# Altium PCB Cashstick.PcbDoc
Units mm, origin at the board's own origin, x right, y up, seen from the top; angles counter-clockwise.
Board outline 51.94 x 15.24 mm, 2 copper layers (Top Layer, Bottom Layer); 30 components, 24 nets, 165 pads, 77 vias.
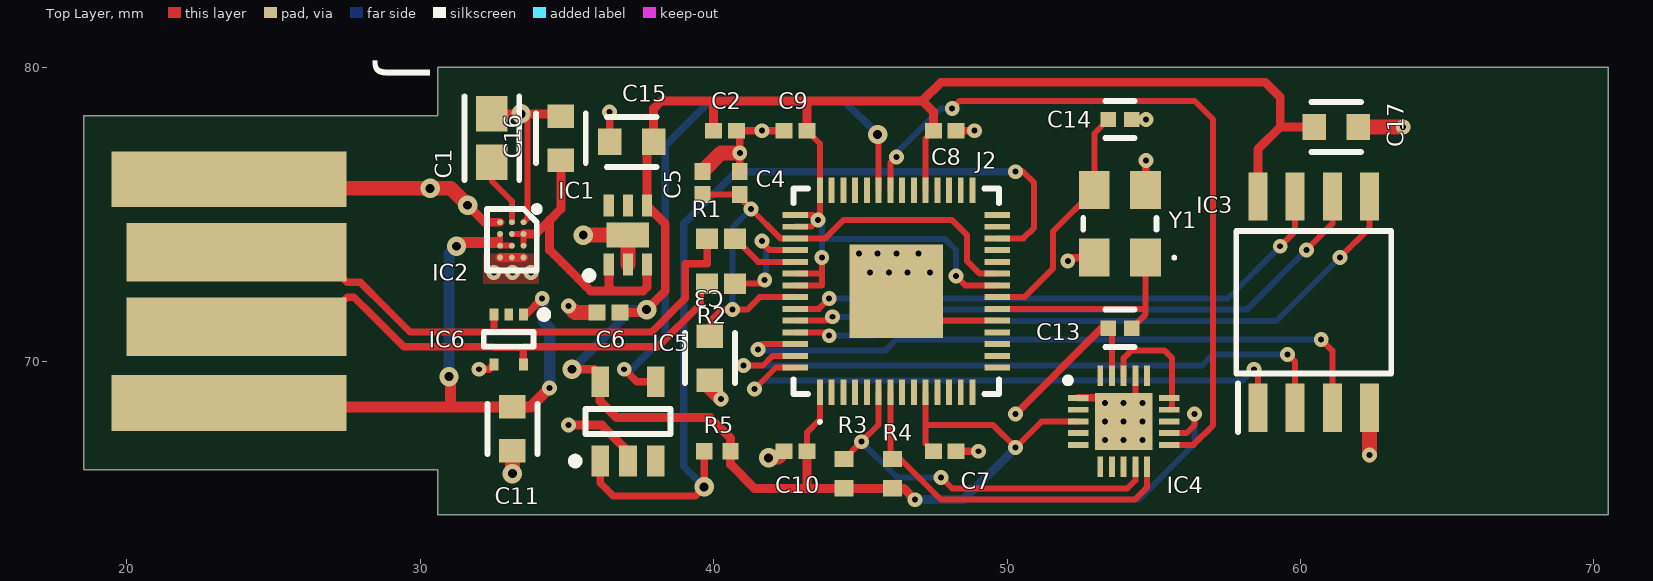
[diagram p0: Top Layer view]
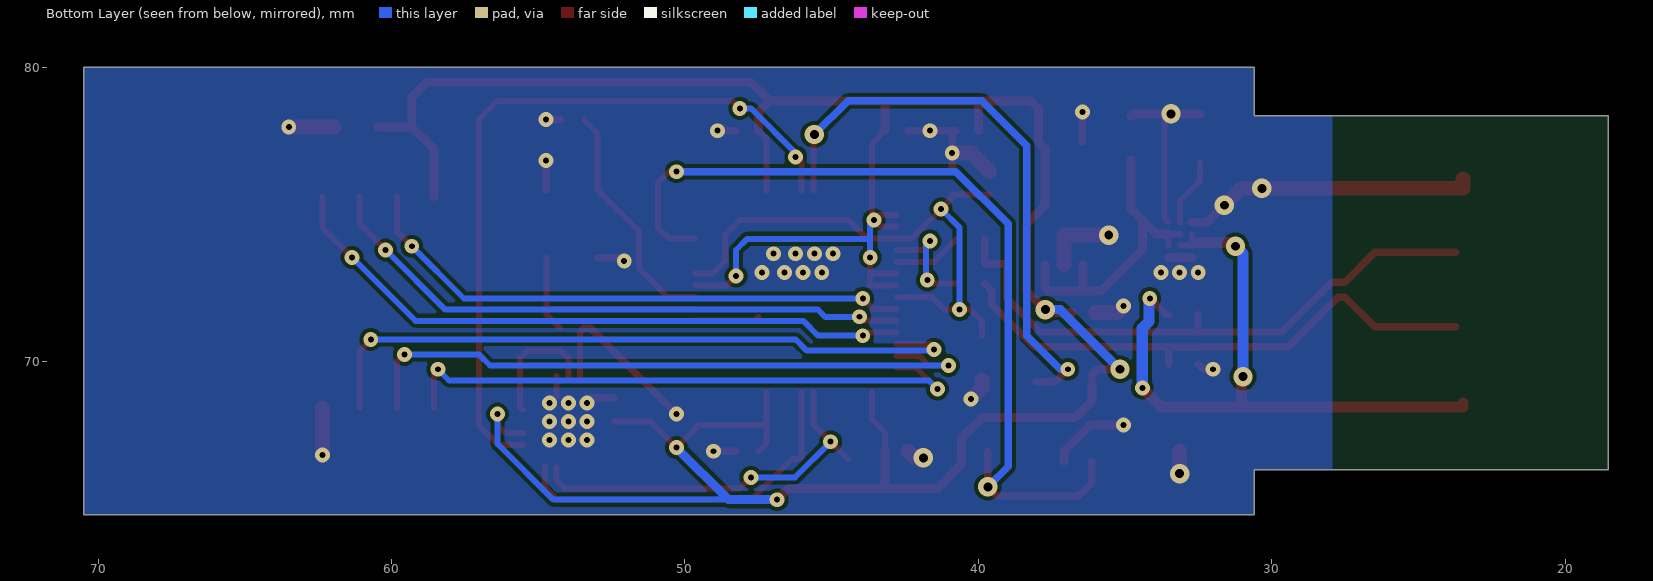
[diagram p1: Bottom Layer view, seen from below]

## Layer stack, top to bottom
Top Solder: solder mask 0.0102, Solder Resist, Dk 3.5
Top Layer: signal copper 0.0356
Dielectric 1: dielectric 0.32, FR-4, Dk 4.8
Bottom Layer: signal copper 0.0356
Bottom Solder: solder mask 0.0102, Solder Resist, Dk 3.5

## Board outline
70.485,80.01 70.485,64.77 30.607,64.77 30.607,66.294 18.542,66.294 18.542,78.359 30.607,78.359 30.607,80.01

## Design rules (kind name [scope] priority, off if disabled: settings)
Clearance [All] p1: gap=0.127 ignorepadtopadclearanceinfootprint=FALSE
DiffPairsRouting [All] p1: maxlimit=0.254 minlimit=0.254 mostfreqgap=0.254 toplayer_minwidth=0.127 toplayer_maxwidth=0.381 toplayer_prefwidth=0.381 bottomlayer_minwidth=0.127 bottomlayer_maxwidth=0.381 bottomlayer_prefwidth=0.381 maxuncoupledlength=12.7
PolygonConnect [All] p1: connectstyle=Direct reliefconductorwidth=0.254 reliefentries=4 polygonreliefangle="90 Angle" airgapwidth=0.254
RoutingVias [All] p1: holewidth=0.203 width=0.508 viastyle="Through Hole" minholewidth=0.127 minwidth=0.508 maxholewidth=0.711 maxwidth=1.27
SolderMaskExpansion [All] p1: expansion=0.102 istentingtop=FALSE
SupplyNets "Schematic Supply Nets_2" [InNet('GND')] p1: voltage=0.000
SupplyNets "Schematic Supply Nets_1" [InNet('3v3')] p2: voltage=0.000
SupplyNets "Schematic Supply Nets" [InNet('1v1')] p3: voltage=0.000
Width [All] p1: maxlimit=0.508 minlimit=0.102 preferedwidth=0.254
29 further rules are at their usual default settings.

## Classes and differential pairs
differential pair USB_D: +USB_D_P -USB_D_N

## Components (designator, comment, footprint, x,y, rotation, side; value= is the part's Value field where it differs from the comment)
C1 "06036D105KAT2A" FP-0603-L_1_6_0_15-W_0_81-IPC_A 32.448,77.597 r90 top
C2 "0402YC104JAT2A" CAPC1005X56X25LL10T15 40.386,77.851 r180 top
C3 "CC0603KRX5R6BB475" FP-CC0603-DA-MFG 39.878,70.104 r270 top value="4.7 uF"
C4 "0402YC104JAT2A" CAPC1005X56X25LL10T15 40.894,76.073 r270 top
C5 "0402YC104JAT2A" CAPC1005X56X25LL10T15 39.624,76.073 r270 top
C6 "0402YC104JAT2A" CAPC1005X56X25LL10T15 36.422,71.657 r0 top
C7 "0402YC104JAT2A" CAPC1005X56X25LL10T15 47.879,66.929 r180 top
C8 "0402YC104JAT2A" CAPC1005X56X25LL10T15 47.879,77.851 r180 top
C9 "0402YC104JAT2A" CAPC1005X56X25LL10T15 42.799,77.851 r0 top
C10 "0402YC104JAT2A" CAPC1005X56X25LL10T15 42.799,66.929 r0 top
C11 "CC0603KRX5R6BB475" FP-CC0603-DA-MFG 33.147,67.691 r270 top value="4.7 uF"
C13 "C0402C150J8HACTU" FP-C0402-BB-MFG 53.848,71.12 r0 top value="15 pF"
C14 "C0402C150J8HACTU" FP-C0402-BB-MFG 53.848,78.232 r180 top value="15 pF"
C15 "CC0603KRX5R6BB475" FP-CC0603-DA-MFG 37.211,77.47 r180 top value="4.7 uF"
C16 "CC0603KRX5R6BB475" FP-CC0603-DA-MFG 34.798,77.597 r90 top value="4.7 uF"
C17 "CC0603KRX5R6BB475" FP-CC0603-DA-MFG 61.214,77.978 r0 top value="4.7 uF"
IC1 "RT9013-33GQW" SON65P200X200X80-7N 37.084,74.295 r90 top
IC2 "TPD1S514-1YZR" BGA12C40P4X3_199X129X62 33.128,74.133 r270 top
IC3 "W25Q32JVSSIM_TR" SOIC127P790X216-8N 60.452,72.009 r90 top
IC4 "SE050E2HQ1_Z01Z3Z" QFN40P300X300X33-21N-D 53.975,67.945 r0 top
IC5 "TPS3820-33DBVRG4" TI-DBV5_V 37.084,67.945 r90 top
IC6 "TPD2E001DRLRG4" DRL0005A_L 33.02,70.739 r270 top
J "USB A PCB" "USB PCB TRACE" 23.749,72.39 r0 top
J2 "SC0914_13_" SC091413 46.225,72.381 r90 top
R1 "CR0402-FX-27R4GLF" RESC1005X40X25ML10T10 40.259,74.168 r0 top
R2 "CR0402-FX-27R4GLF" RESC1005X40X25ML10T10 40.259,72.644 r180 top
R3 "2K2 5% 0402(1005)" RESC0402(1005)_N 44.45,66.167 r90 top value="2200.00 Ohm"
R4 "2K2 5% 0402(1005)" RESC0402(1005)_N 46.101,66.167 r270 top value="2200.00 Ohm"
R5 "TNPW040210K0DEED" RESC1005X40X20NL05T10 40.132,66.929 r0 top
Y1 "ABM8-272-T3" ABM8272T3 53.848,74.676 r90 top

## Footprints (in the part's own frame and the unit in brackets; to place one, negate y for a bottom-side part, rotate by r counter-clockwise, add the part's x,y. Pads: shape width x height; smd on the part's side, far side on the other; paste and mask are expansions set on the pad)
ABM8272T3 [mm]
  rect 1.3x1.05 smd: 1(-1.15,-0.875) 2(1.15,-0.875) 3(1.15,0.875) 4(-1.15,0.875)
  silkscreen extent -1.2,-1.9 0.2,1.25, body extent -1.6,-1.25 1.6,1.25, height 0.75
BGA12C40P4X3_199X129X62 [mm]
  round 0.2 smd: A1(-0.6,0.4) A2(-0.2,0.4) A3(0.2,0.4) A4(0.6,0.4) B1(-0.6,0) B2(-0.2,0) B3(0.2,0) B4(0.6,0) C1(-0.6,-0.4) C2(-0.2,-0.4) C3(0.2,-0.4) C4(0.6,-0.4)
  silkscreen extent -1.15,-0.85 1.05,0.95, body extent -0.99,-0.64 0.99,0.64, height 0.63
CAPC1005X56X25LL10T15 [mm] "Chip Capacitor, 2-Leads, Body 1.00x0.50mm, IPC High Density"
  rect 0.58x0.54 smd: 1(-0.39,0) 2(0.39,0)
  body extent -0.55,-0.3 0.55,0.3, height 0.56
DRL0005A_L [mm] "SOT23, 5-Leads, Body 1.7x1.3mm, Pitch 0.5mm, IPC High Density"
  rect 0.4x0.3 smd: 1(-0.85,0.5) 2(-0.85,0) 3(-0.85,-0.5) 4(0.85,-0.5) 5(0.85,0.5)
  silkscreen extent -0.97,-0.85 0.25,1.33, body extent -0.65,-0.85 0.65,0.85, height 0.6
FP-0603-L_1_6_0_15-W_0_81-IPC_A [mil]
  rect 47.5x42.06 smd paste+0 mask+0: 1(-32.51,0) 2(32.51,0)
  silkscreen extent -56,-37 56,37, body extent -76,-41 76,41, height 10
FP-C0402-BB-MFG [mm]
  rect 0.52x0.52 smd paste+0 mask+0: 1(-0.4,0) 2(0.4,0)
  silkscreen extent -0.5,-0.64 0.5,0.64, body extent -0.8,-0.4 0.8,0.4, height 0.25
FP-CC0603-DA-MFG [mm]
  rect 0.8x0.9 smd paste+0 mask+0: 1(-0.75,0) 2(0.75,0)
  silkscreen extent -0.85,-0.85 0.85,0.85, body extent -0.8,-0.4 0.8,0.4, height 0.9
QFN40P300X300X33-21N-D [mm]
  rect 0.7x0.2 smd: 1(-1.55,0.8) 2(-1.55,0.4) 3(-1.55,0) 4(-1.55,-0.4) 5(-1.55,-0.8) 11(1.55,-0.8) 12(1.55,-0.4) 13(1.55,0) 14(1.55,0.4) 15(1.55,0.8)
  rect 0.2x0.7 smd: 6(-0.8,-1.55) 7(-0.4,-1.55) 8(0,-1.55) 9(0.4,-1.55) 10(0.8,-1.55) 16(0.8,1.55) 17(0.4,1.55) 18(0,1.55) 19(-0.4,1.55) 20(-0.8,1.55)
  rect 1.95x1.95 smd: 21(0,0)
  silkscreen extent -2,1.3 -1.8,1.5, body extent -1.55,-1.55 1.55,1.55, height 0.33
RESC0402(1005)_N [mm] "Chip Resistor, Body 1.0x0.5mm, IPC Medium Density"
  rect 0.55x0.65 smd: 1(-0.5,0) 2(0.5,0)
  body extent -0.52,-0.27 0.53,0.28, height 0.4
RESC1005X40X20NL05T10 [mm] "Chip Resistor, 2-Leads, Body 1.00x0.50mm, IPC Medium Density"
  rect 0.55x0.55 smd: 1(-0.45,0) 2(0.45,0)
  body extent -0.53,-0.27 0.53,0.28, height 0.4
RESC1005X40X25ML10T10 [mm] "Chip Resistor, 2-Leads, Body 1.00x0.50mm, IPC Low Density"
  rect 0.75x0.7 smd: 1(-0.475,0) 2(0.475,0)
  body extent -0.55,-0.3 0.55,0.3, height 0.4
SC091413 [mm]
  rect 0.875x0.2 smd: 1(-3.438,2.6) 2(-3.438,2.2) 3(-3.438,1.8) 4(-3.438,1.4) 5(-3.438,1) 6(-3.438,0.6) 7(-3.438,0.2) 8(-3.438,-0.2) 9(-3.438,-0.6) 10(-3.438,-1) 11(-3.438,-1.4) 12(-3.438,-1.8) 13(-3.438,-2.2) 14(-3.438,-2.6) 29(3.438,-2.6) 30(3.438,-2.2) 31(3.438,-1.8) 32(3.438,-1.4) 33(3.438,-1) 34(3.438,-0.6) 35(3.438,-0.2) 36(3.438,0.2) 37(3.438,0.6) 38(3.438,1) 39(3.438,1.4) 40(3.438,1.8) 41(3.438,2.2) 42(3.438,2.6)
  rect 0.2x0.875 smd: 15(-2.6,-3.438) 16(-2.2,-3.438) 17(-1.8,-3.438) 18(-1.4,-3.438) 19(-1,-3.438) 20(-0.6,-3.438) 21(-0.2,-3.438) 22(0.2,-3.438) 23(0.6,-3.438) 24(1,-3.438) 25(1.4,-3.438) 26(1.8,-3.438) 27(2.2,-3.438) 28(2.6,-3.438) 43(2.6,3.438) 44(2.2,3.438) 45(1.8,3.438) 46(1.4,3.438) 47(1,3.438) 48(0.6,3.438) 49(0.2,3.438) 50(-0.2,3.438) 51(-0.6,3.438) 52(-1,3.438) 53(-1.4,3.438) 54(-1.8,3.438) 55(-2.2,3.438) 56(-2.6,3.438)
  rect 3.2x3.2 smd: 57(0,0)
  silkscreen extent -4.5,-3.5 3.5,3.5, body extent -3.5,-3.5 3.5,3.5, height 0.92
SOIC127P790X216-8N [mm]
  rect 1.65x0.65 smd: 1(-3.6,1.905) 2(-3.6,0.635) 3(-3.6,-0.635) 4(-3.6,-1.905) 5(3.6,-1.905) 6(3.6,-0.635) 7(3.6,0.635) 8(3.6,1.905)
  silkscreen extent -4.43,-2.64 2.42,2.64, body extent -3.95,-2.64 3.95,2.64, height 2.16
SON65P200X200X80-7N [mm]
  rect 0.75x0.35 smd: 1(-1,0.65) 2(-1,0) 3(-1,-0.65) 4(1,-0.65) 5(1,0) 6(1,0.65)
  rect 0.85x1.45 smd: 7(0,0)
  silkscreen extent -1.5,1.2 -1.25,1.45, body extent -1.05,-1 1.05,1, height 0.8
TI-DBV5_V [mm] "SOT23, 5-Leads, Body 2.9x1.6mm, Pitch 0.95mm"
  rect 1.05x0.6 smd paste-0.025 mask+0.07: 1(-1.35,0.95) 2(-1.35,0) 3(-1.35,-0.95) 4(1.35,-0.95) 5(1.35,0.95)
  silkscreen extent -1.47,-1.45 0.43,1.92, body extent -0.8,-1.45 0.8,1.45, height 1.45
"USB PCB TRACE" [mm] "USB TYPE A on PCB TRACE"
  rect 8x1.9 smd: 1(-0.254,-3.815) 4(-0.254,3.81)
  rect 7.5x2 smd: 2(-0.004,-1.223) 3(-0.004,1.318)

## Part data
C1: library part CMP-2006-04474-2, "General Purpose Ceramic Capacitor, 0603, 1uF, 10%, X5R, 15%, 6.3V", Capacitance=1uF, Case Code (Imperial)=0603, Case Code (Metric)=1608, Dielectric=X5R, Insulation Resistance=100GR, Max Operating Temperature=85°C, Min Operating Temperature=-55°C, Package Quantity=1, Tolerance=10%, Voltage=6.3V, Case/Package=0603, Construction=Flat, Contact Plating=Tin, Depth=0.81mm, Dissipation Factor=5%, Height=0.9mm, Lead Free="Lead Free", Length=1.6mm, Mount="Surface Mount", Number of Pins=2, Packaging="Tape and Reel", Radiation Hardening=No, REACH SVHC="No SVHC", RoHS Compliant=Yes, Series=-, Termination=SMD/SMT, Thickness=0.035inch, Voltage Rating=6.3V, Voltage Rating (DC)=6.3V, Width=0.032inch
C2 C4 C5 C6 C7 C8 C9 C10: library part CMP-2008-02926-1, Manufacturer="AVX Interconnect / Elco", Part Number=0402YC104JAT2A
C3 C11 C15 C16 C17: library part CMP-2000-06074-2, "CAP CER 4.7UF 10V X5R 0603", Capacitance="4.7 uF", Manufacturer=YAGEO, Package=CC0603-DA, Temperature="-55°C to +125°C", Temperature Characteristic=X5R, Temperature Coefficient=15%, Temperature Range High=+125°C, Temperature Range Low=-55°C, Tolerance=0.1, Voltage="10 V", Automotive=No, Category=Cap, ComponentLink2Description=Datasheet, ComponentLink2URL=http://www.yageo.com/documents/recent/UPY-GPHC_X7R_6.3V-to-50V_18.pdf, Device Class L1="Passive Components", Device Class L2=Capacitors, Device Class L3="Ceramic Capacitors", Digikey Description="CAP CER 4.7UF 10V X5R 0603", Footprint Url=http://www.yageo.com/exep/pages/download/literatures/UPY-C_GEN_24.pdf, Height=0.9mm, Lead Free=Yes, Manufacturer Part Number=CC0603KRX5R6BB475, Material=Ceramic, Mouser Description="4.7µF Surface Mount, MLCC 0603 (1608 Metric) Package Ceramic Capacitors", Octopart=https://octopart.com/cc0603krx5r6bb475-yageo-9292507, RoHS=TRUE, Voltage Rating="10 V"
C13 C14: library part CMP-03020-013640-1, "C0402 15 pF X8R 5.00% 10 V", Capacitance="15 pF", Manufacturer=Kemet, Package=C0402-BB, Temperature="-55°C to +125°C", Temperature Characteristic=X8R, Temperature Coefficient=15%, Temperature Range High=+125°C, Temperature Range Low=-55°C, Tolerance=0.05, Voltage Rating="10 V", Automotive=No, Category=Cap, ComponentLink2Description=Datasheet, ComponentLink2URL=https://content.kemet.com/datasheets/KEM_C1002_X7R_SMD.pdf, Device Class L1="Passive Components", Device Class L2=Capacitors, Device Class L3="Ceramic Capacitors", Height=0.55mm, Ipc Land Pattern Name=CAPC10050X50, Lead Free=Yes, Manufacturer Part Number=C0402C150J8HACTU, Material=Ceramic, Octopart=https://octopart.com/c0402c150j8hactu-kemet-88724175, RoHS=TRUE
IC1: "Integrated Circuit", Manufacturer_Name=RICHTEK, Mouser Part Number=835-RT9013-33GQW, Datasheet Link=https://eu.mouser.com/datasheet/2/1458/DS9013_10-3104853.pdf, Height=0.8mm, Manufacturer_Part_Number=RT9013-33GQW, Mouser Price/Stock=https://www.mouser.co.uk/ProductDetail/Richtek/RT9013-33GQW?qs=amGC7iS6iy%2Fa0fR0lBiZlg%3D%3D
IC2: "Integrated Circuit", Manufacturer_Name="Texas Instruments", Mouser Part Number=595-TPD1S514-1YZR, Arrow Part Number=TPD1S514-1YZR, Arrow Price/Stock=https://www.arrow.com/en/products/tpd1s514-1yzr/texas-instruments, Datasheet Link=http://www.ti.com/lit/gpn/tpd1s514, Height=0.625mm, Manufacturer_Part_Number=TPD1S514-1YZR, Mouser Price/Stock=https://www.mouser.co.uk/ProductDetail/Texas-Instruments/TPD1S514-1YZR?qs=U0ECReq1GB8vEu4GjuBhFg%3D%3D
IC3: "Integrated Circuit", Arrow Part Number="W25Q32JVSSIM TR", Manufacturer_Name=Winbond, Mouser Part Number=454-W25Q32JVSSIMTR, Arrow Price/Stock=https://www.arrow.com/en/products/w25q32jvssimtr/winbond-electronics?utm_currency=USD&region=nac, Datasheet Link=https://www.mouser.com/datasheet/2/949/w25q32jv_dtr_revg_03272018_plus-1489786.pdf, Height=2.16mm, Manufacturer_Part_Number="W25Q32JVSSIM TR", Mouser Price/Stock=https://www.mouser.co.uk/ProductDetail/Winbond/W25Q32JVSSIM-TR?qs=qSfuJ%252Bfl%2Fd55hO45Ox4sXQ%3D%3D
IC4: "Integrated Circuit", Arrow Part Number=SE050E2HQ1/Z01Z3Z, Manufacturer_Name=NXP, Mouser Part Number=771-SE050E2HQ1Z01Z3Z, Arrow Price/Stock=https://www.arrow.com/en/products/se050e2hq1z01z3z/nxp-semiconductors?utm_currency=USD&region=nac, Datasheet Link=https://www.nxp.com/docs/en/package-information/SOT1969-1.pdf, Height=0.33mm, Manufacturer_Part_Number=SE050E2HQ1/Z01Z3Z, Mouser Price/Stock=https://www.mouser.co.uk/ProductDetail/NXP-Semiconductors/SE050E2HQ1-Z01Z3Z?qs=MyNHzdoqoQJLcBuQE9NcBA%3D%3D
IC5: library part CMP-0338-00012-1, "Processor Supervisory Circuit, 1 Supply Monitored, -40 to 85 degC, 5-Pin SOT-23 (DBV), Green (RoHS & no Sb/Br)", Manufacturer="Texas Instruments", Operating Temperature Range="-40 to 85 degC", Rating=Catalog, Threshold Voltage="2.93 V Typ.", # of Supplies Monitored=1, ComponentLink1Description="Manufacturer URL", ComponentLink1URL=www.ti.com, ComponentLink2Description=Datasheet, ComponentLink2URL=http://www.ti.com/lit/ds/symlink/tps3820-33.pdf, ComponentLink3Description="Package Specification", ComponentLink3URL=http://www.ti.com/lit/ml/mpds018j/mpds018j.pdf, DatasheetVersion=SLVS165J, Iq="15 uA Typ.", Mounting Technology="Surface Mount", Output Driver Type / Reset Output="Active-low, Push-pull", PackageDescription="5-Pin Plastic Small Outline, Body 1.6 x 2.9 mm, Pitch 0.95 mm", PackageVersion=4073253-4/L, Packing="Tape and Reel", PartNumber=TPS3820-33DBVRG4, Reset Threshold Accuracy=2.4%, RoHS=TRUE, Time Delay="25 ms", VCC="1.1 V Min.", Watchdog Timer WDI="0.2 s"
IC6: library part CMP-0326-00050-2, "Low-Capacitance + / - 15 kV ESD-Protection Array for High-Speed Data Interfaces, 2 Channels, -40 to +85 degC, 5-pin SOT (DRL), Green (RoHS & no Sb/Br)", Breakdown Voltage(Min)(V)=11, IO Capacitance(Typ)(pF)=1.5, IO Leakage Current(nA)=1, Manufacturer="Texas Instruments", ComponentLink1Description="Manufacturer URL", ComponentLink1URL=http://www.ti.com/, ComponentLink2Description=Datasheet, ComponentLink2URL=http://www.ti.com/general/docs/lit/getliterature.tsp?genericPartNumber=TPD2E001&fileType=pdf, ComponentLink3Description="URL Link1", ComponentLink3URL=SamplesURL:http://www.ti.com/product/tpd2e001#samples, DatasheetVersion=SLLS684F, Eco-Plan="Green (RoHS & no Sb/Br)", IEC 61000-4-2 Air-Gap(+/- kV)=15, IEC 61000-4-2 Contact(+/- kV)=8, Mounting Technology="Surface Mount", PackageDescription="5-Pin Plastic Small Outline, Flat Lead 0.5 mm Pitch", PackageReference=DRL0005A, PackageVersion="revD, Aug-2007", PartNumber=TPD2E001DRLRG4, SubFamily="ESD Solution", USB High Speed=TRUE
J2: "Connector", Manufacturer_Name=RASPBERRY-PI, Manufacturer_Part_Number=SC0914(13), Mouser Part Number=358-SC091413, Datasheet Link=https://datasheets.raspberrypi.com/rp2040/rp2040-datasheet.pdf, Height=0.9mm, Mouser Price/Stock=https://www.mouser.co.uk/ProductDetail/Raspberry-Pi/SC091413?qs=T%252BzbugeAwjhr%252BUbBr3TJcw%3D%3D
R1 R2: library part CMP-2002-05023-1, Manufacturer=Bourns, Part Number=CR0402-FX-27R4GLF
R3 R4: library part CMP-1011-00082-1, "2K2 0.063W 5% 0402 (1005 Metric)  SMD", Case-EIA=0402, Case-Metric=1005, Power="0.063 W", Tolerance="5 %", Technology=SMT
R5: library part CMP-2002-01682-1, Manufacturer="Vishay BCcomponents", Part Number=TNPW040210K0DEED
Y1: "Crystal or Oscillator", Manufacturer_Name=ABRACON, Mouser Part Number=815-ABM8-272-T3, Datasheet Link=https://abracon.com/datasheets/ABM8-272-T3.pdf, Height=0.8mm, Manufacturer_Part_Number=ABM8-272-T3, Mouser Price/Stock=https://www.mouser.co.uk/ProductDetail/ABRACON/ABM8-272-T3?qs=QpmGXVUTftEj6miOiJBMxQ%3D%3D

## Via types
v1: diameter 0.508, hole 0.203, Top Layer to Bottom Layer, 65 vias
v2: diameter 0.66, hole 0.305, Top Layer to Bottom Layer, 12 vias

## Nets (pads, with @x,y where several pads share a name; then routed paths per layer and width w, separated by ;. In a path a pad name is that pad's centre, name@x,y a point inside that pad or via, vN(x,y) a via of type N, cw(c..) or ccw(c..) an arc to the next point about the centre after c; other vN are vias at no path point)
1v1: C3.1 C4.2 C5.2 J2.23 J2.45 J2.50 | length 19.8
  Top Layer w0.203: C5.2 C4.2 40.894,75.565 v1(41.275,75.184) 42.278,74.181 J2.45 43.802,74.181 44.424,74.803 48.133,74.803 48.641,74.295 48.641,73.406 49.066,72.981 J2.23 ; C3.1 39.878,71.374 40.259,71.755 v1(40.64,71.755) ; v1@40.703,71.755 v1(40.64,71.755) ; J2.50 41.574,72.181 41.148,71.755 v1(40.64,71.755)
  Bottom Layer w0.203: v1(40.64,71.755) 40.64,74.549 v1(41.275,75.184)
3v3: C2.2 C6.2 C7.2 C8.2 C9.2 C10.2 C15.1 C17.1 IC1.4 IC3.8 IC4.3 IC4.12 IC5.5 J2.1 J2.10 J2.22 J2.33 J2.42 J2.43 J2.44 J2.48 J2.49 R3.1 R4.2 R5.2 | length 101.4
  Top Layer w0.203: 35.814,69.723 35.819,69.718 IC5.5@35.936,69.718 ; IC5.5 IC5.5@36.134,69.52 ; J2.49 43.688,72.581 43.688,72.981 ; J2.48 43.688,72.981 ; J2.44 43.339,74.581 v1(43.561,74.803) ; J2.43 43.383,74.981 v1(43.561,74.803) ; C10.2 43.189,67.573 43.625,68.009 J2.1 ; C9.2 43.625,77.415 J2.42 43.625,74.867 v1(43.561,74.803) ; v1(43.688,73.533) 43.688,72.981 ; J2.10 47.225,67.818 ; J2.33 47.225,77.587 C8.2 ; C7.2 47.225,67.193 47.225,67.818 ; v1(48.26,72.898) 48.577,72.581 J2.22 ; IC4.3 51.181,67.945 v1(50.292,67.056) 49.53,67.818 47.225,67.818 ; IC4.12 56.115,67.545 56.388,67.818 v1(56.388,68.199)
  Top Layer w0.305: v2(35.179,69.723) 35.814,69.723 ; IC5.5@35.936,69.718 IC5.5@36.134,69.52 ; IC5.5 36.134,68.641 36.703,68.072 39.878,68.072 40.582,67.368 R5.2 40.582,66.479 41.402,65.659 41.41,65.667 43.18,65.667 ; C6.2 37.621,71.657 v2(37.719,71.755) 38.354,72.39 38.354,74.675 IC1.4 37.734,77.243 C15.1 37.961,78.601 38.227,78.867 40.005,78.867 ; C2.2 39.996,78.858 40.005,78.867 ; C10.2 43.189,65.676 43.18,65.667 ; C9.2 43.18,77.86 43.18,78.867 ; v1(46.863,65.278) 46.474,65.667 R4.2 R3.1 43.18,65.667 ; C8.2 47.489,78.495 47.117,78.867 ; IC3.8 58.547,77.216 59.309,77.978 ; C17.1 59.309,77.978 ; 40.005,78.867 43.18,78.867 ; 43.18,78.867 47.117,78.867 ; 47.117,78.867 47.752,79.502 58.801,79.502 59.309,78.994 59.309,77.978
  Bottom Layer w0.203: v1(43.561,74.803) 43.688,74.676 43.688,74.105 ; v1(43.688,73.533) 43.688,74.105 ; v1(48.26,72.898) 48.26,73.787 47.879,74.168 43.752,74.168 43.688,74.105 ; 48.471,65.278 54.483,65.278 56.388,67.183 v1(56.388,68.199)
  Bottom Layer w0.305: v2(35.179,69.723) 37.211,71.755 v2(37.719,71.755) ; v1(46.863,65.278) 48.514,65.278 v1(50.292,67.056)
050_EN: IC4.11 J2.36 | length 25.3
  Top Layer w0.203: J2.36 46.025,76.759 v1(46.228,76.962) ; v1(48.133,78.613) 48.387,78.867 56.388,78.867 57.023,78.232 57.023,67.818 56.35,67.145 IC4.11
  Bottom Layer w0.203: v1(46.228,76.962) 46.228,77.089 47.752,78.613 v1(48.133,78.613)
050_I2S_SCL: IC4.10 J2.7 R4.1 | length 12.4
  Top Layer w0.203: J2.7 46.025,66.743 R4.1 46.363,66.667 47.752,65.278 54.356,65.278 54.775,65.697 IC4.10
050_I2S_SDA: IC4.9 J2.6 R3.2 | length 13.3
  Top Layer w0.203: R3.2 v1(45.037,67.255) 45.625,67.842 J2.6 ; v1(47.752,66.04) 48.133,65.659 54.102,65.659 54.375,65.932 IC4.9
  Bottom Layer w0.203: v1(45.037,67.255) 46.252,66.04 v1(47.752,66.04)
GND: C1.2 C2.1 C3.2 C4.1 C5.1 C6.1 C7.1 C8.1 C9.1 C10.1 C11.2 C13.1 C14.1 C15.2 C16.2 C17.2 IC1.2 IC1.7 IC2.A1 IC2.A4 IC2.B4 IC2.C1 IC2.C4 IC3.4 IC4.1 IC4.17 IC4.19 IC4.21 IC5.2 IC6.4 J2.19 J2.57 J.4 Y1.2 Y1.4 | length 49.1
  Top Layer w0.203: v2(33.439,78.423) 33.655,78.207 33.655,74.86 IC2.A1 ; J2.57@47.498,71.501 47.618,71.381 J2.19 ; IC4.19 C13.1@53.575,70.993 ; IC4.21@54.375,68.815 IC4.17
  Top Layer w0.254: v1(32.004,69.723) 32.354,69.723 IC6.4 ; v1(36.449,78.486) 36.461,78.474 C15.2 ; C4.1 v1(40.894,77.089) 40.894,77.733 C2.1 v1(41.656,77.851) ; v1@41.783,77.851 v1(41.656,77.851) ; C9.1 v1(41.656,77.851) ; C7.1 v1(49.022,66.929) ; C8.1 v1(48.895,77.851) ; v1(50.292,68.199) 53.213,71.12 C13.1 C13.1@53.575,70.993 ; v1(52.07,73.406) 52.19,73.526 Y1.4 ; IC4.1 53.175,68.745 v1(53.34,68.58) ; C14.1 v1(54.737,78.232) ; IC4.21@54.375,68.815 v1(54.61,68.58) ; Y1.2 54.723,76.821 v1(54.737,76.835)
  Top Layer w0.305: v2(31.623,75.311) 32.201,74.733 IC2.C1 ; C1.2 v2(33.439,78.423) 34.722,78.423 C16.2 ; IC2.C4 IC2.B4 IC2.A4 ; v1(35.052,67.818) 36.195,67.818 37.084,66.929 IC5.2
  Top Layer w0.508: J.4 23.495,75.89 v2(30.344,75.89) ; v2@30.344,75.89 31.044,75.89 v2(31.623,75.311) ; v2(33.147,66.167) C11.2 ; v1(35.052,71.882) 35.277,71.657 C6.1 ; v2(35.56,74.295) IC1.7 IC1.2 ; C5.1 40.25,77.089 v1(40.894,77.089) ; C3.2 39.878,69.088 v1(40.259,68.707) ; v2(41.879,66.706) 41.908,66.736 42.196,66.736 42.389,66.929 C10.1 ; C17.2 v1(63.5,77.978) ; v1(62.357,66.802) IC3.4
  other v1: 53.34,67.31 53.975,67.31 54.61,67.31 53.34,67.945 53.975,67.945 54.61,67.945 53.975,68.58 32.512,73.025 33.147,73.025 33.782,73.025 45.339,73.025 45.974,73.025 46.609,73.025 47.371,73.025 44.958,73.66 45.593,73.66 46.228,73.66 46.99,73.66
NetC1_1: C1.1 IC2.B1 | length 2.3
  Top Layer w0.203: C1.1 32.448,76.137 33.128,75.457 IC2.B1
NetIC4_14: IC4.14 IC4.15 IC4.18 | length 4.3
  Top Layer w0.203: IC4.18 53.975,70.104 54.229,70.358 55.372,70.358 55.626,70.104 55.626,68.446 IC4.14
NetJ2_46: J2.46 R2.1 | length 3.8
  Top Layer w0.203: R2.1 41.623,72.644 v1(41.744,72.765) ; v1(41.653,74.096) 41.653,74.044 41.916,73.781 J2.46
  Bottom Layer w0.203: v1(41.653,74.096) 41.793,73.956 41.793,72.814 v1(41.744,72.765)
NetJ2_47: J2.47 R1.2 | length 2.4
  Top Layer w0.203: R1.2 41.521,73.381 42.04,73.381 J2.47
QSPI_SCLK: IC3.6 J2.52 | length 20.6
  Top Layer w0.203: J2.52 43.845,71.381 43.976,71.512 v1(44.058,71.512) ; v1(60.198,73.787) 61.087,74.676 IC3.6
  Bottom Layer w0.203: v1(44.058,71.512) 44.069,71.501 45.212,71.501 45.466,71.755 58.166,71.755 v1(60.198,73.787)
QSPI_SD0: IC3.5 J2.53 | length 22.2
  Top Layer w0.203: J2.53 43.827,70.981 v1(43.942,70.866) ; v1(61.341,73.533) 62.357,74.549 IC3.5
  Bottom Layer w0.203: v1(43.942,70.866) 45.466,70.866 45.974,71.374 59.182,71.374 v1(61.341,73.533)
QSPI_SD1: IC3.2 J2.55 | length 22.5
  Top Layer w0.203: v1(41.021,69.85) 41.687,69.85 42.018,70.181 J2.55 ; v1(59.563,70.231) 59.817,69.977 IC3.2
  Bottom Layer w0.203: v1(41.021,69.85) 56.642,69.85 57.023,70.231 v1(59.563,70.231)
QSPI_SD2: IC3.3 J2.54 | length 23.3
  Top Layer w0.203: v1(41.508,70.401) 41.508,70.45 41.639,70.581 J2.54 ; v1(60.706,70.739) 61.087,70.358 IC3.3
  Bottom Layer w0.203: v1@41.528,70.498 41.528,70.421 v1(41.508,70.401) 41.551,70.358 45.847,70.358 46.228,70.739 v1(60.706,70.739)
QSPI_SD3: IC3.7 J2.51 | length 19.3
  Top Layer w0.203: J2.51 43.587,71.781 v1(43.942,72.136) ; v1(59.309,73.914) 59.817,74.422 IC3.7
  Bottom Layer w0.203: v1(43.942,72.136) 57.531,72.136 v1(59.309,73.914)
QSPI_SS: IC3.1 J2.56 | length 20.4
  Top Layer w0.203: v1(41.398,69.048) 42.13,69.781 J2.56 ; v1(58.42,69.723) 58.547,69.596 IC3.1
  Bottom Layer w0.203: v1(41.398,69.048) 41.691,69.342 58.039,69.342 v1(58.42,69.723)
USB_D_N: IC6.5 J.2 R2.2 | length 18.9
  Top Layer w0.254: J.2 26.495,71.167 27.512,72.184 27.749,72.184 28.333,71.6 29.448,70.485 32.512,70.485 32.52,70.477 33.52,70.477 ; IC6.5 33.52,70.477 ; R2.2 39.546,72.406 39.546,71.931 38.1,70.485 33.528,70.485 33.52,70.477
USB_D_P: IC6.3 J.3 R1.1 | length 20.3
  Top Layer w0.254: J.3 26.495,73.708 27.512,72.692 27.959,72.692 28.841,71.81 29.658,70.993 32.512,70.993 ; IC6.3 32.52,71.001 32.512,70.993 ; R1.1 39.784,73.324 39.037,73.324 39.037,72.141 37.89,70.993 32.512,70.993
VBUS_CONN: C11.1 IC2.B3 IC2.C2 IC2.C3 IC6.1 J.1 | length 23.3
  Top Layer w0.203: 32.636,74.041 32.728,74.133 ; IC2.C2 32.728,74.133 ; IC2.B3 IC2.C3 32.728,74.133
  Top Layer w0.254: IC6.1 33.616,71.589 v1(34.163,72.136)
  Top Layer w0.381: J.1 23.495,68.441 31.037,68.441 ; v2(30.988,69.469) 31.037,69.42 31.037,68.441 ; v2(31.242,73.914) 31.369,74.041 32.636,74.041 ; v1(34.417,69.088) 33.77,68.441 C11.1 31.037,68.441
  Bottom Layer w0.381: v2(30.988,69.469) 30.988,73.66 v2(31.242,73.914) ; v1(34.163,72.136) 34.187,72.112 34.187,71.35 34.417,71.12 v1(34.417,69.088)
VBUS_SYS: C16.1 IC1.1 IC1.3 IC2.A2 IC2.A3 IC2.B2 | length 10.9
  Top Layer w0.203: IC2.B2 IC2.A2 IC2.A3
  Top Layer w0.229: IC2.A2 33.562,74.299 33.635,74.299
  Top Layer w0.305: IC2.A2 33.947,74.333 34.417,74.803 ; C16.1 34.798,75.184 34.417,74.803 ; IC1.1 36.434,72.532 36.576,72.39 ; IC1.3 37.734,72.532 37.592,72.39 36.576,72.39 ; 34.417,74.803 34.417,73.787 35.814,72.39 36.576,72.39
WD_RESET: IC5.1 J2.26 R5.1 | length 30.8
  Top Layer w0.203: J2.26 50.559,74.181 50.927,74.549 50.927,76.073 50.546,76.454 v1(50.292,76.454)
  Top Layer w0.254: IC5.1 36.134,65.847 36.576,65.405 39.37,65.405 v2(39.682,65.717) R5.1
  Bottom Layer w0.254: v2(39.682,65.717) 38.989,66.41 38.989,74.676 40.767,76.454 v1(50.292,76.454)
WD_WDI: IC5.4 J2.37 | length 19.9
  Top Layer w0.203: J2.37 v2@45.625,77.692
  Top Layer w0.254: v1(36.957,69.723) 37.385,69.295 IC5.4 ; v2(45.593,77.724) v2@45.625,77.692
  Bottom Layer w0.254: v1(36.957,69.723) 37.211,69.723 38.354,70.866 38.354,77.343 39.887,78.876 44.441,78.876 v2(45.593,77.724)
XIN: C13.2 J2.20 Y1.1 | length 7.7
  Top Layer w0.203: J2.20 54.697,71.781 54.723,71.755 ; C13.2 54.723,71.595 54.723,71.755 ; Y1.1 54.723,71.755
XOUT: C14.2 J2.21 Y1.3 | length 8.2
  Top Layer w0.203: J2.21 50.591,72.181 51.562,73.152 51.562,74.415 Y1.3 52.973,77.757 C14.2
pads on no net: IC1.5 IC1.6 IC4.2 IC4.4 IC4.5 IC4.6 IC4.7 IC4.8 IC4.13 IC4.16 IC4.20 IC5.3 IC6.2 J2.2 J2.3 J2.4 J2.5 J2.8 J2.9 J2.11 J2.12 J2.13 J2.14 J2.15 J2.16 J2.17 J2.18 J2.24 J2.25 J2.27 J2.28 J2.29 J2.30 J2.31 J2.32 J2.34 J2.35 J2.38 J2.39 J2.40 J2.41

## Polygon pours and split planes (outlines as drawn)
GND on Bottom Layer "NONET_L-01_P-001" (solid, pour order 0): 30.607,80.01 30.607,78.359 27.94,78.359 27.94,66.294 30.607,66.294 30.607,64.77 70.485,64.77 70.485,80.01
GND on Top Layer "NONET_L-01_P-001" (solid, pour order 1): 32.146,73.66 34.036,73.66 34.036,72.644 33.909,72.644 32.146,72.644

## Silkscreen, mask and mechanical layers (free items; w line width, h text height)
V Cut:
  lines w0.8: 64.389,64.77 64.389,80.01